# Altium PCB PCB_Relay.PcbDoc
Units mm, origin at the board's own origin, x right, y up, seen from the top; angles counter-clockwise.
Board outline 89.66 x 66.55 mm, 2 copper layers (Top Layer, Bottom Layer), stack 1.671 mm thick; 13 components, 12 nets, 71 pads, 0 vias.
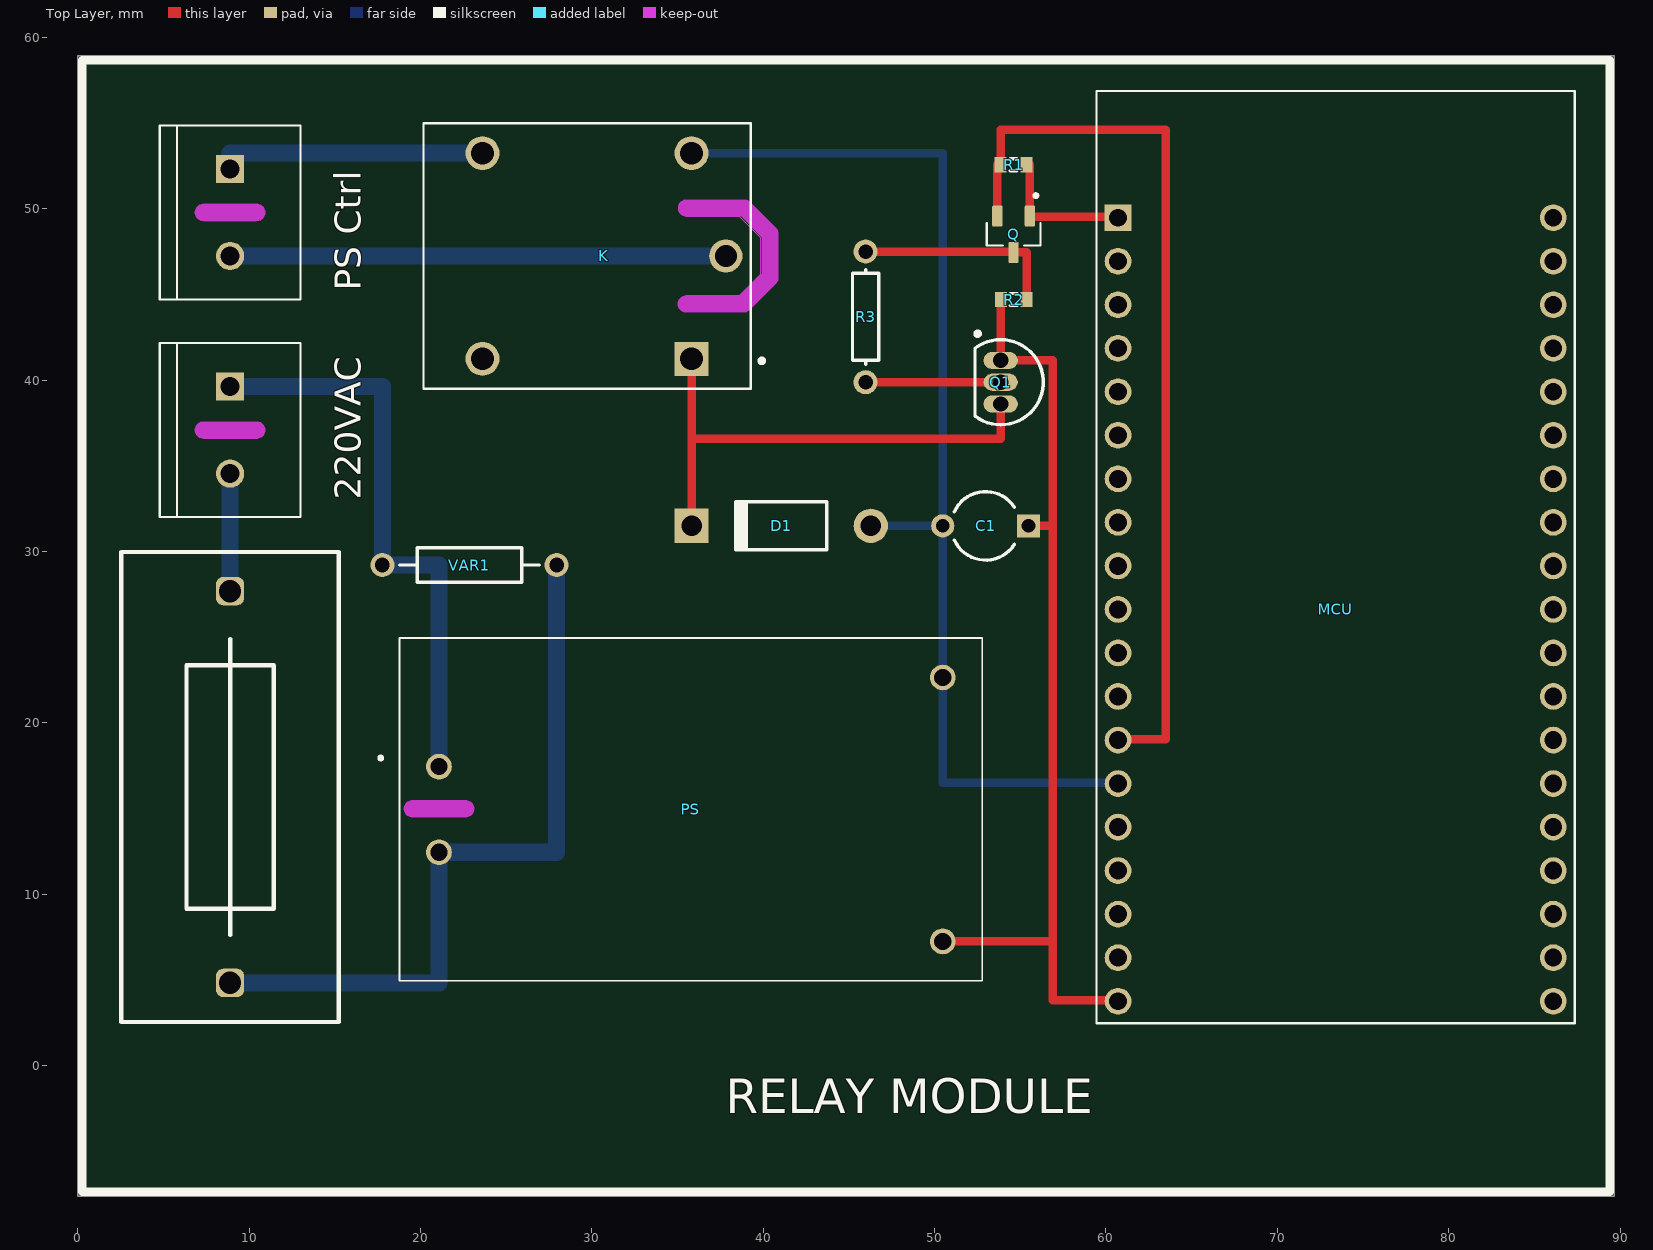
[diagram p0: Top Layer view]
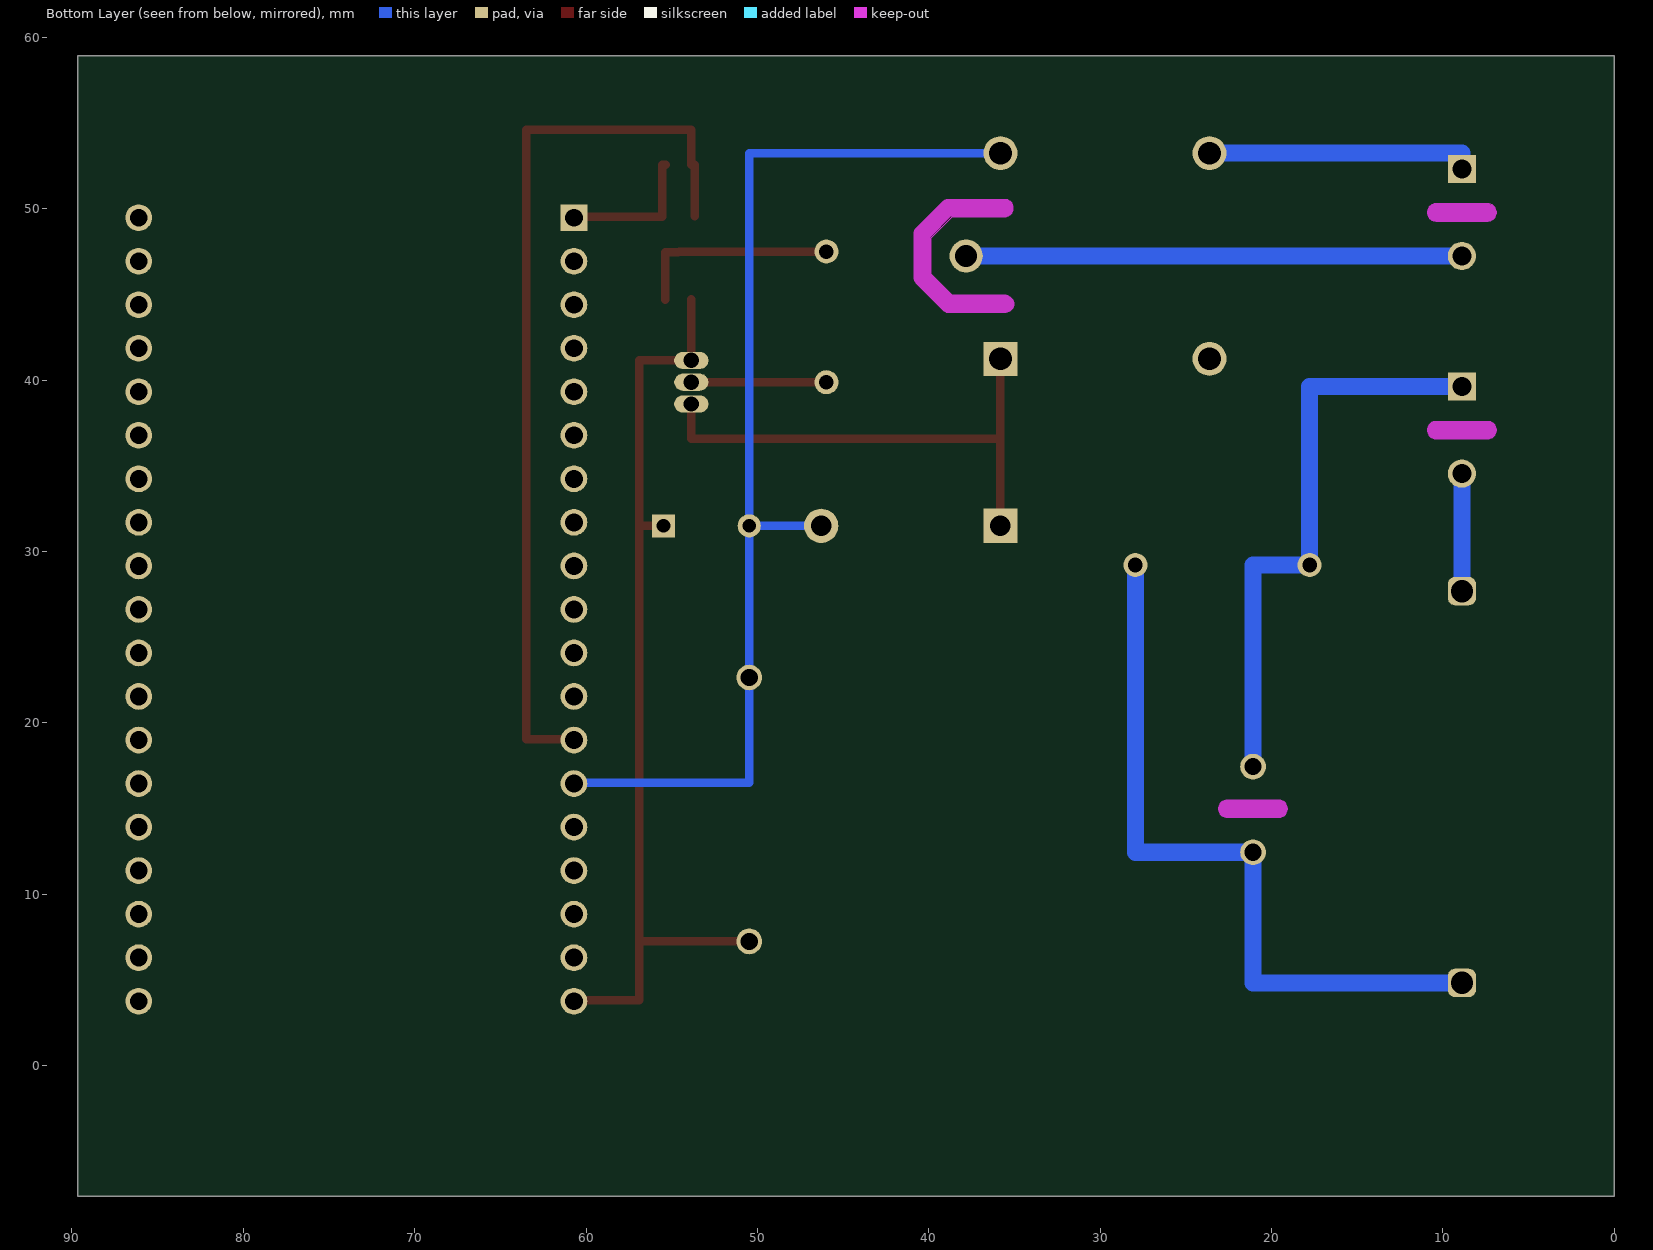
[diagram p1: Bottom Layer view, seen from below]

## Layer stack, top to bottom
Top Solder: solder mask 0.0102, Solder Resist, Dk 3.5
Top Layer: signal copper 0.0356
Dielectric 1: dielectric 1.6, FR-4, Dk 4.8
Bottom Layer: signal copper 0.0356
Bottom Solder: solder mask 0.0102, Solder Resist, Dk 3.5

## Board outline
0,58.928 0,-7.62 89.662,-7.62 89.662,58.928
cut-out: 35.56,44.95 38.627,44.95 39.858,46.181 39.858,48.307 38.627,49.538 35.56,49.538 cw(c35.56,50.038) 35.56,50.538 38.834,50.538 cw(c38.834,50.038) 39.188,50.392 40.712,48.868 cw(c40.358,48.514) 40.858,48.514 40.858,45.974 cw(c40.358,45.974) 40.712,45.62 39.188,44.096 cw(c38.834,44.45) 38.834,43.95 35.56,43.95 cw(c35.56,44.45)
cut-out: 7.366,49.284 cw(c7.366,49.784) 7.366,50.284 10.414,50.284 cw(c10.414,49.784) 10.914,49.784 cw(c10.414,49.784) 10.414,49.284
cut-out: 7.366,36.584 cw(c7.366,37.084) 7.366,37.584 10.414,37.584 cw(c10.414,37.084) 10.914,37.084 cw(c10.414,37.084) 10.414,36.584
cut-out: 19.558,14.486 cw(c19.558,14.986) 19.558,15.486 22.606,15.486 cw(c22.606,14.986) 23.106,14.986 cw(c22.606,14.986) 22.606,14.486

## Design rules (kind name [scope] priority, off if disabled: settings)
Clearance [All] p1: gap=0.1 ignorepadtopadclearanceinfootprint=FALSE
MinimumSolderMaskSliver [All] p1: minsoldermaskwidth=0.05
PolygonConnect [All] p1: connectstyle=Relief reliefconductorwidth=0.254 reliefentries=4 polygonreliefangle="90 Angle" airgapwidth=0.254
RoutingVias [All] p1: holewidth=0.3 width=0.6 viastyle="Through Hole" minholewidth=0.3 minwidth=0.6 maxholewidth=0.3 maxwidth=0.6
SilkToSolderMaskClearance [IsPad] p1: minsilkscreentomaskgap=0.001 clearancetoexposedcopper=TRUE
SolderMaskExpansion [All] p1: expansion=0.102
Width [All] p1: maxlimit=1 minlimit=0.3 preferedwidth=0.5
28 further rules are at their usual default settings.

## Components (designator, comment, footprint, x,y, rotation, side; value= is the part's Value field where it differs from the comment)
220VAC "282837-2" TE_282837-2 8.89,37.084 r270 top
C1 "Cap2" CAPR5-4X5 52.978,31.496 r180 top value=220µF
D1 "Diode 1N4001" DO-41 41.048,31.496 r180 top
K "SRD-05VDC-SL-C" RELAY_SRD-05VDC-SL-C 29.718,47.244 r180 top
MCU "ESP32-DEVKITC-32D" MODULE_ESP32-DEVKITC-32D 73.406,29.718 r0 top
PS "HLK-PM01" HLKPM01 21.078,17.446 r0 top
"PS Ctrl" "282837-2" TE_282837-2 8.89,49.784 r270 top (schematic designator PS_Ctrl)
Q "BSS138" SOT95P240X111-3N 54.61,48.514 r270 top
Q1 "2N3906" TO-92A 53.86,39.878 r180 top
R1 "Res3" J1-0603 54.61,52.578 r0 top value=10K
R2 "Res3" J1-0603 54.622,44.704 r180 top value=10K
R3 "" AXIAL-0.3 45.974,43.688 r270 top value=1K
VAR1 "MOV-10D471K" AXIAL-0.4 22.86,29.21 r180 top value=1K

## Footprints (in the part's own frame and the unit in brackets; to place one, negate y for a bottom-side part, rotate by r counter-clockwise, add the part's x,y. Pads: shape width x height; smd on the part's side, far side on the other; paste and mask are expansions set on the pad)
AXIAL-0.3 [mm] "Axial Device, Thru-Hole; 2 Leads; 0.3 in Pin Spacing"
  round 1.4 hole 0.85: 1(-3.81,0) 2(3.81,0)
  silkscreen extent -2.77,-0.76 2.77,0.76
AXIAL-0.4 [mm] "Axial Device, Thru-Hole; 2 Leads; 0.4 in Pin Spacing"
  round 1.4 hole 0.85: 1(-5.08,0) 2(5.08,0)
  silkscreen extent -4.06,-1.02 4.06,1.02
CAPR5-4X5 [mm] "Capacitor; 2 Leads"
  rect 1.35x1.35 hole 0.8: 1(-2.5,0)
  round 1.35 hole 0.8: 2(2.5,0)
  silkscreen extent -1.69,-2 1.82,2
DO-41 [mm] "Diode, Axial; Body 5.2 x 2.7 mm (LxDia. max), Lead Dia. 0.86 mm (max)"
  round 2 hole 1.2: 1(-5.23,0)
  rect 2x2 hole 1.2: 2(5.23,0)
  silkscreen extent -2.65,-1.4 2.75,1.4
HLKPM01 [mm]
  round 1.5 hole 1: 1(0,0) 2(0,-5) 3(29.4,5.2) 4(29.4,-10.2)
  silkscreen extent -3.5,-12.5 31.7,7.5
J1-0603 [mm] "Chip Resistor, Body 1.6x0.8mm, IPC High Density"
  rect 0.7x0.9 smd: 1(-0.75,0) 2(0.75,0)
  silkscreen extent -0.2,-0.35 0.2,0.35, body extent -0.85,-0.48 0.85,0.48, height 0.9
MODULE_ESP32-DEVKITC-32D [mm]
  rect 1.56x1.56 hole 1.04: 1(-12.7,19.76)
  round 1.56 hole 1.04: 2(-12.7,17.22) 3(-12.7,14.68) 4(-12.7,12.14) 5(-12.7,9.6) 6(-12.7,7.06) 7(-12.7,4.52) 8(-12.7,1.98) 9(-12.7,-0.56) 10(-12.7,-3.1) 11(-12.7,-5.64) 12(-12.7,-8.18) 13(-12.7,-10.72) 14(-12.7,-13.26) 15(-12.7,-15.8) 16(-12.7,-18.34) 17(-12.7,-20.88) 18(-12.7,-23.42) 19(-12.7,-25.96) 20(12.7,19.76) 21(12.7,17.22) 22(12.7,14.68) 23(12.7,12.14) 24(12.7,9.6) 25(12.7,7.06) 26(12.7,4.52) 27(12.7,1.98) 28(12.7,-0.56) 29(12.7,-3.1) 30(12.7,-5.64) 31(12.7,-8.18) 32(12.7,-10.72) 33(12.7,-13.26) 34(12.7,-15.8) 35(12.7,-18.34) 36(12.7,-20.88) 37(12.7,-23.42) 38(12.7,-25.96)
  silkscreen extent -13.95,-27.25 13.95,27.15
RELAY_SRD-05VDC-SL-C [mm]
  rect 1.98x1.98 hole 1.32: A1(-6.1,6)
  round 1.98 hole 1.32: A2(-6.1,-6) NC(6.1,6) NO(6.1,-6)
  round 1.935 hole 1.29: COM(-8.1,0)
  silkscreen extent -10.3,-7.75 9.55,7.75
SOT95P240X111-3N [mm]
  rrect25% 1.23x0.6 smd: 1(-1.06,0.95) 2(-1.06,-0.95) 3(1.06,0)
  silkscreen extent -2.35,-1.57 0.65,1.57
TE_282837-2 [mm]
  rect 1.65x1.65 hole 1.1: 1(-2.54,0)
  round 1.65 hole 1.1: 2(2.54,0)
  silkscreen extent -5.08,-4.1 5.08,4.1
TO-92A [mm] "TO, Flat Index; 3 In-Line, Axial Leads; Body Dia. 4.5mm; Leads 0.51 x 0.48 mm (max)"
  oval 2x1 hole 0.9: 1(0,-1.27) 2(0,0) 3(0,1.27)
  silkscreen extent -2.48,-2.95 1.5,2.48, body extent -2.48,-2.5 1.5,2.5, height 6.86

## Part data
220VAC "PS Ctrl": "Connector Terminal Blocks Receptacle 2 Position 5.08mm Solder Straight Thru-Hole 13.5A/Contact", Package=None, Digi-Key_Part_Number=A113320-ND, Digi-Key_Purchase_URL=https://www.digikey.in/product-detail/en/te-connectivity-amp-connectors/282837-2/A113320-ND/2187973?utm_source=snapeda&utm_medium=aggregator&utm_campaign=symbol, MF="TE Connectivity", MP=282837-2, SnapEDA_Link=https://www.snapeda.com/parts/282837-2/TE%20Connectivity%20AMP%20Connectors/view-part/2549980/?ref=snap, TE_purchase_URL=https://www.te.com/usa-en/product-282837-2.html?te_bu=Cor&te_type=disp&te_campaign=seda_glo_cor-seda-global-disp-prtnr-fy19-seda-model-bom-cta_sma-317_1&elqCampaignId=32493
C1: "Capacitor", PackageDescription="Capacitor; 2 Leads", PackageReference=CAPR5-4X5, Published=23-Sep-2002, Publisher="Altium Limited"
D1: "1 Amp General Purpose Rectifier", Code_JEDEC=DO-204-AL, ComponentLink1Description="Manufacturer Link", ComponentLink1URL=http://www.fairchildsemi.com/, ComponentLink2Description=Datasheet, ComponentLink2URL=http://www.fairchildsemi.com/ds/1N%2F1N4001.pdf, DatasheetVersion=1998, LatestRevisionDate=17-Jul-2002, LatestRevisionNote="Re-released for DXP Platform.", PackageDescription="Diode, Axial; Body 5.2 x 2.7 mm (LxDia. max), Lead Dia. 0.86 mm (max)", PackageReference=DO-41, PackageVersion=Aug-1999, Published=8-Jun-2000, Publisher="Altium Limited"
K: "5V Trigger Relay", Package=None, Availability=Unavailable, MF="Songle Relay", MP=SRD-05VDC-SL-C, Price=None, SnapEDA_Link=https://www.snapeda.com/parts/SRD-05VDC-SL-C/Songle%20Relay/view-part/1029484/?ref=snap
MCU: "- Transceiver; 802.11 b/g/n _Wi-Fi, WiFi, WLAN_, Bluetooth® Smart Ready 4.x Dual Mode For Use With ESP-WROOM-32", Package=None, Availability=Unavailable, MF="Espressif Systems", MP=ESP32-DEVKITC-32D, Price=None, SnapEDA_Link=https://www.snapeda.com/parts/ESP32-DEVKITC-32D/Espressif%20Systems/view-part/2777395/?ref=snap
PS: "<b>Ultra-compact power module</b><p> Source: <a href=\"https://datasheet.lcsc.com/szlcsc/1906201102_HI-LINK-HLK-PM03_C209904.pdf\"> Datasheet </a>", Package="Package Analog Devices", Availability=Unavailable, MF=Hi-link, MP=hlk-pm01, Price=None, SnapEDA_Link=https://www.snapeda.com/parts/hlk-pm01/Hi-link/view-part/2875605/?ref=snap
Q: "N-Channel 50V 220mA (Ta) 360mW (Ta) Surface Mount SOT-23-3", Package="TO-236-3 Micross", Arrow_Electronics-Purchase-URL=https://snapeda.com/shop?store=Arrow+Electronics&id=2773844, Availability=Good, DigiKey-Purchase-URL=https://snapeda.com/shop?store=DigiKey&id=2773844, MF="MICROSS/On Semiconductor", Mouser-Purchase-URL=https://snapeda.com/shop?store=Mouser&id=2773844, MP=BSS138, Price=None, SnapEDA_Link=https://www.snapeda.com/parts/BSS138/MICROSS/On%20Semiconductor/view-part/2773844/?ref=snap
Q1: "PNP General Purpose Amplifier", ComponentLink1Description="Manufacturer Link", ComponentLink1URL=http://www.fairchildsemi.com/, ComponentLink2Description=Datasheet, ComponentLink2URL=http://www.fairchildsemi.com/ds/2N%2F2N3906.pdf, DatasheetVersion=1997, LatestRevisionDate=15-Jan-2003, LatestRevisionNote="PCB Footprint 'BCY-W3/D4.7' replaced", PackageDescription="TO, Flat Index; 3 In-Line, Axial Leads; Body Dia. 4.5mm; Leads 0.51 x 0.48 mm (max)", PackageReference=TO-92A, PackageVersion=Sep-1998, Published=8-Jun-2000, Publisher="Altium Limited"
R1 R2: "Resistor", LatestRevisionDate=29-May-2009, LatestRevisionNote="IPC-7351 Footprint Added.", PackageDescription="Chip Resistor", PackageReference=J1-0603, Published=8-Jun-2000, Publisher="Altium Limited"
R3: library part Res1, "Resistor", LatestRevisionDate=17-Jul-2002, LatestRevisionNote="Re-released for DXP Platform.", PackageDescription="Axial Device, Thru-Hole; 2 Leads; 0.3 in Pin Spacing", PackageReference=AXIAL-0.3, Published=8-Jun-2000, Publisher="Altium Limited"
VAR1: library part Res2, LatestRevisionDate=17-Jul-2002, LatestRevisionNote="Re-released for DXP Platform.", PackageDescription="Axial Device, Thru-Hole; 2 Leads; 0.4 in Pin Spacing", PackageReference=AXIAL-0.4, Published=8-Jun-2000, Publisher="Altium Limited"

## Free pads (board coordinates)
  rrect50% 1.65x1.65 hole 1.3: 1(8.89,27.686) 2(8.89,4.826)

## Nets (pads, with @x,y where several pads share a name; then routed paths per layer and width w, separated by ;. In a path a pad name is that pad's centre, name@x,y a point inside that pad or via, vN(x,y) a via of type N, cw(c..) or ccw(c..) an arc to the next point about the centre after c; other vN are vias at no path point)
3V3: MCU.1 Q.1 R1.2 | length 7.6
  Top Layer w0.5: R1.2 55.56,52.578 Q.1 55.56,49.53 MCU.1@59.944,49.53
5V: C1.1 MCU.19 PS.4 Q1.1 R2.2 | length 55.6
  Top Layer w0.5: PS.4 56.896,7.246 ; R2.2 53.872,41.16 Q1.1 56.896,41.148 56.896,31.496 ; C1.1 56.896,31.496 ; MCU.19@60.706,3.81 56.896,3.81 56.896,7.246 ; 56.896,7.246 56.896,31.496
GND: C1.2 D1.1 K.A2 MCU.14 PS.3 | length 65.1
  Bottom Layer w0.5: K.A2 50.478,53.244 C1.2 ; D1.1 C1.2 ; MCU.14@59.944,16.51 50.478,16.51 PS.3 C1.2
Net220VAC_1: 220VAC.1 PS.1 VAR1.2 | length 34.4
  Bottom Layer w1: 220VAC.1 17.78,39.624 VAR1.2 21.078,29.21 PS.1
Net220VAC_2: 220VAC.2 pad.1 | length 6.9
  Bottom Layer w1: pad.1 220VAC.2
NetD1_2: D1.2 K.A1 Q1.3 | length 29.8
  Top Layer w0.5: D1.2 35.818,36.576 ; K.A1 35.818,36.576 ; Q1.3 53.86,36.576 35.818,36.576
NetF1_1: pad.2 PS.2 VAR1.1 | length 43.4
  Bottom Layer w1: pad.2 21.078,4.826 PS.2 27.94,12.446 VAR1.1
NetK_COM: "PS Ctrl.2" K.COM | length 28.9
  Bottom Layer w1: 8.89,47.244 K.COM
NetK_NO: "PS Ctrl.1" K.NO | length 15.6
  Bottom Layer w1: 8.89,52.324 8.89,53.244 K.NO
NetQ1_2: Q1.2 R3.2 | length 7.9
  Top Layer w0.5: R3.2 Q1.2
NetQ_3: Q.3 R2.1 R3.1 | length 12.2
  Top Layer w0.5: R3.1 54.566,47.498 Q.3 55.372,47.454 R2.1
Re_Sig: MCU.13 Q.2 R1.1 | length 53.2
  Top Layer w0.5: Q.2 53.66,52.578 R1.1 53.86,54.61 63.5,54.61 63.5,19.05 MCU.13@60.706,19.05
pads on no net: K.NC MCU.2 MCU.3 MCU.4 MCU.5 MCU.6 MCU.7 MCU.8 MCU.9 MCU.10 MCU.11 MCU.12 MCU.15 MCU.16 MCU.17 MCU.18 MCU.20 MCU.21 MCU.22 MCU.23 MCU.24 MCU.25 MCU.26 MCU.27 MCU.28 MCU.29 MCU.30 MCU.31 MCU.32 MCU.33 MCU.34 MCU.35 MCU.36 MCU.37 MCU.38

## Polygon pours and split planes (outlines as drawn)
no net on Top Overlay (solid): 16.256,49.53

## Keep-outs
Keep-Out Layer:
  lines w1: 7.366,37.084 10.414,37.084 ; 7.366,49.784 10.414,49.784 ; 19.558,14.986 22.606,14.986 ; 35.51,44.45 38.848,44.45 40.386,45.988 40.386,48.56 38.908,50.038 35.56,50.038

## Silkscreen, mask and mechanical layers (free items; w line width, h text height)
Top Overlay:
  pour cut-out: 45.974,60.452
  lines w0.254: 8.89,7.62 8.89,24.892 ; 2.54,2.54 2.54,29.972 15.24,29.972 15.24,2.54 2.54,2.54 ; 6.35,9.144 6.35,23.368 11.43,23.368 11.43,9.144 6.35,9.144
  lines w0.5: 0.254,-7.366 0.254,58.674 89.408,58.674 89.408,-7.366 0.254,-7.366
  text "RELAY MODULE" at 37.818,-2.794 h2